# Altium PCB btn_single_v1.0.PcbDoc
Units mm, origin at the board's own origin, x right, y up, seen from the top; angles counter-clockwise.
Board outline 152.4 x 101.6 mm, 2 copper layers (Top Layer, Bottom Layer); 26 components, 21 nets, 86 pads, 0 vias.
Unrouted connection lines stored in the file: 6.
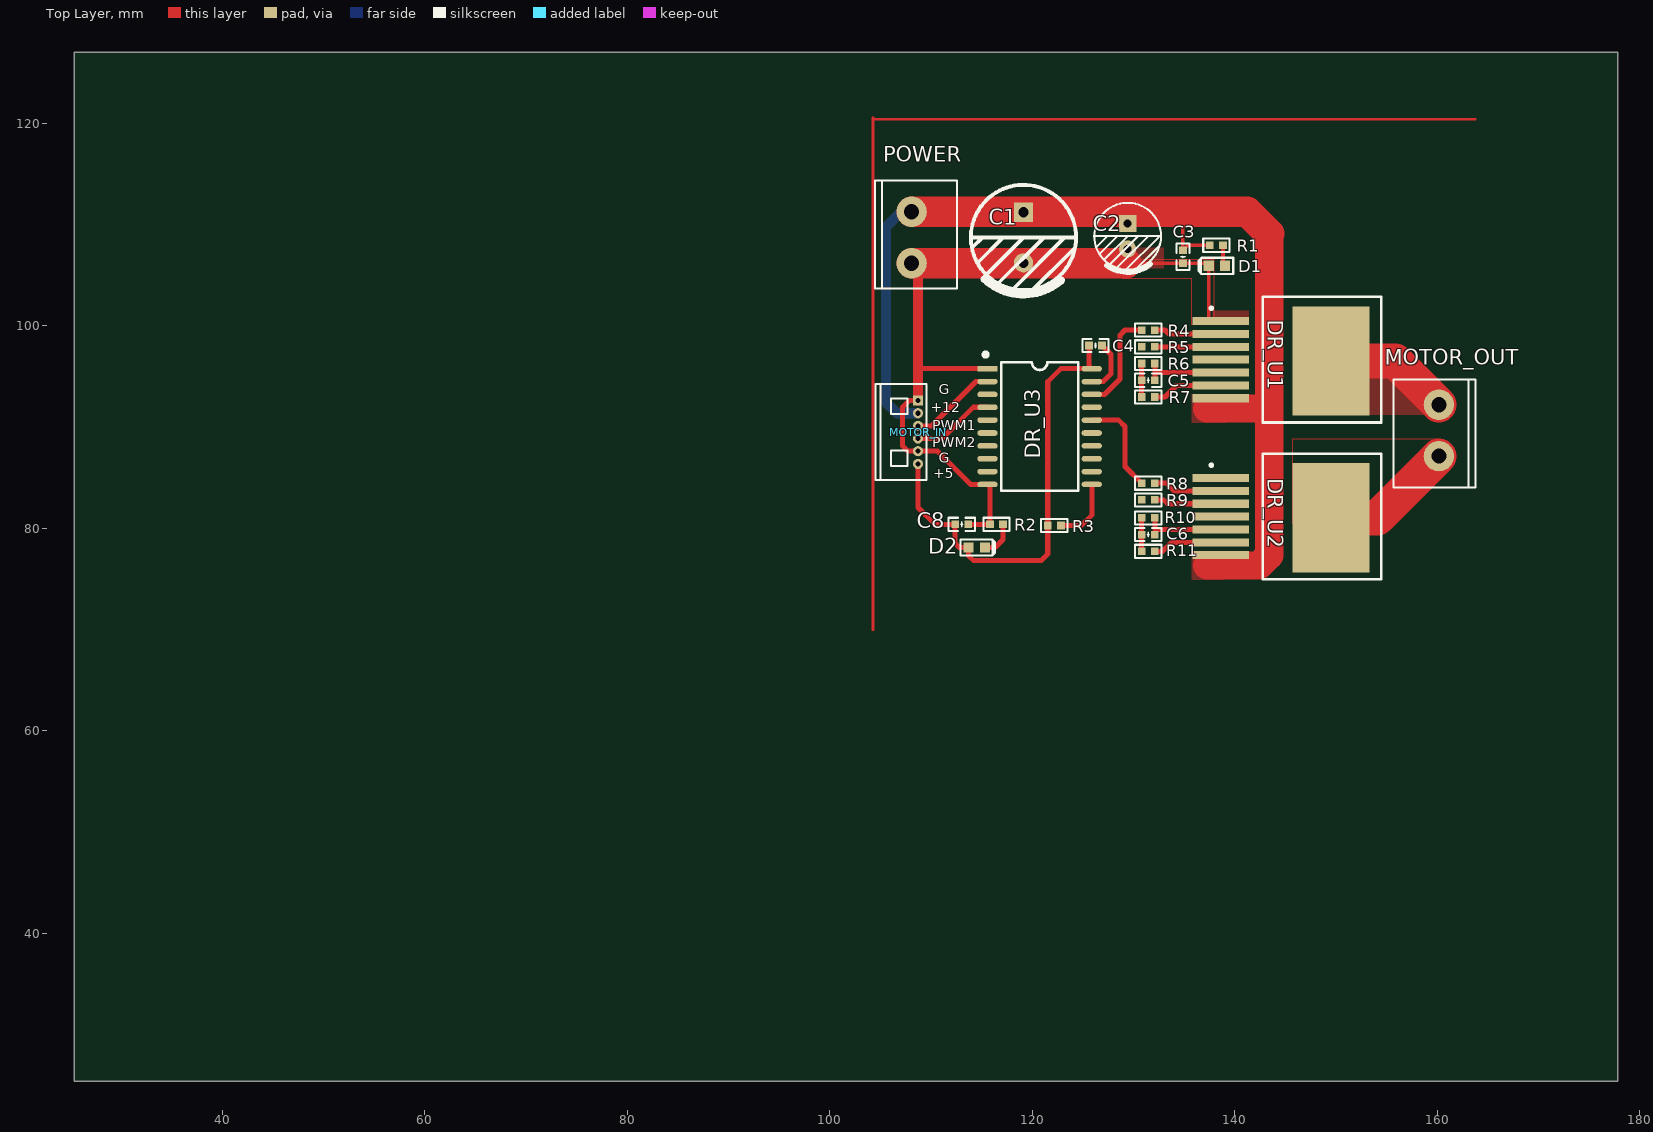
[diagram p0: Top Layer view]
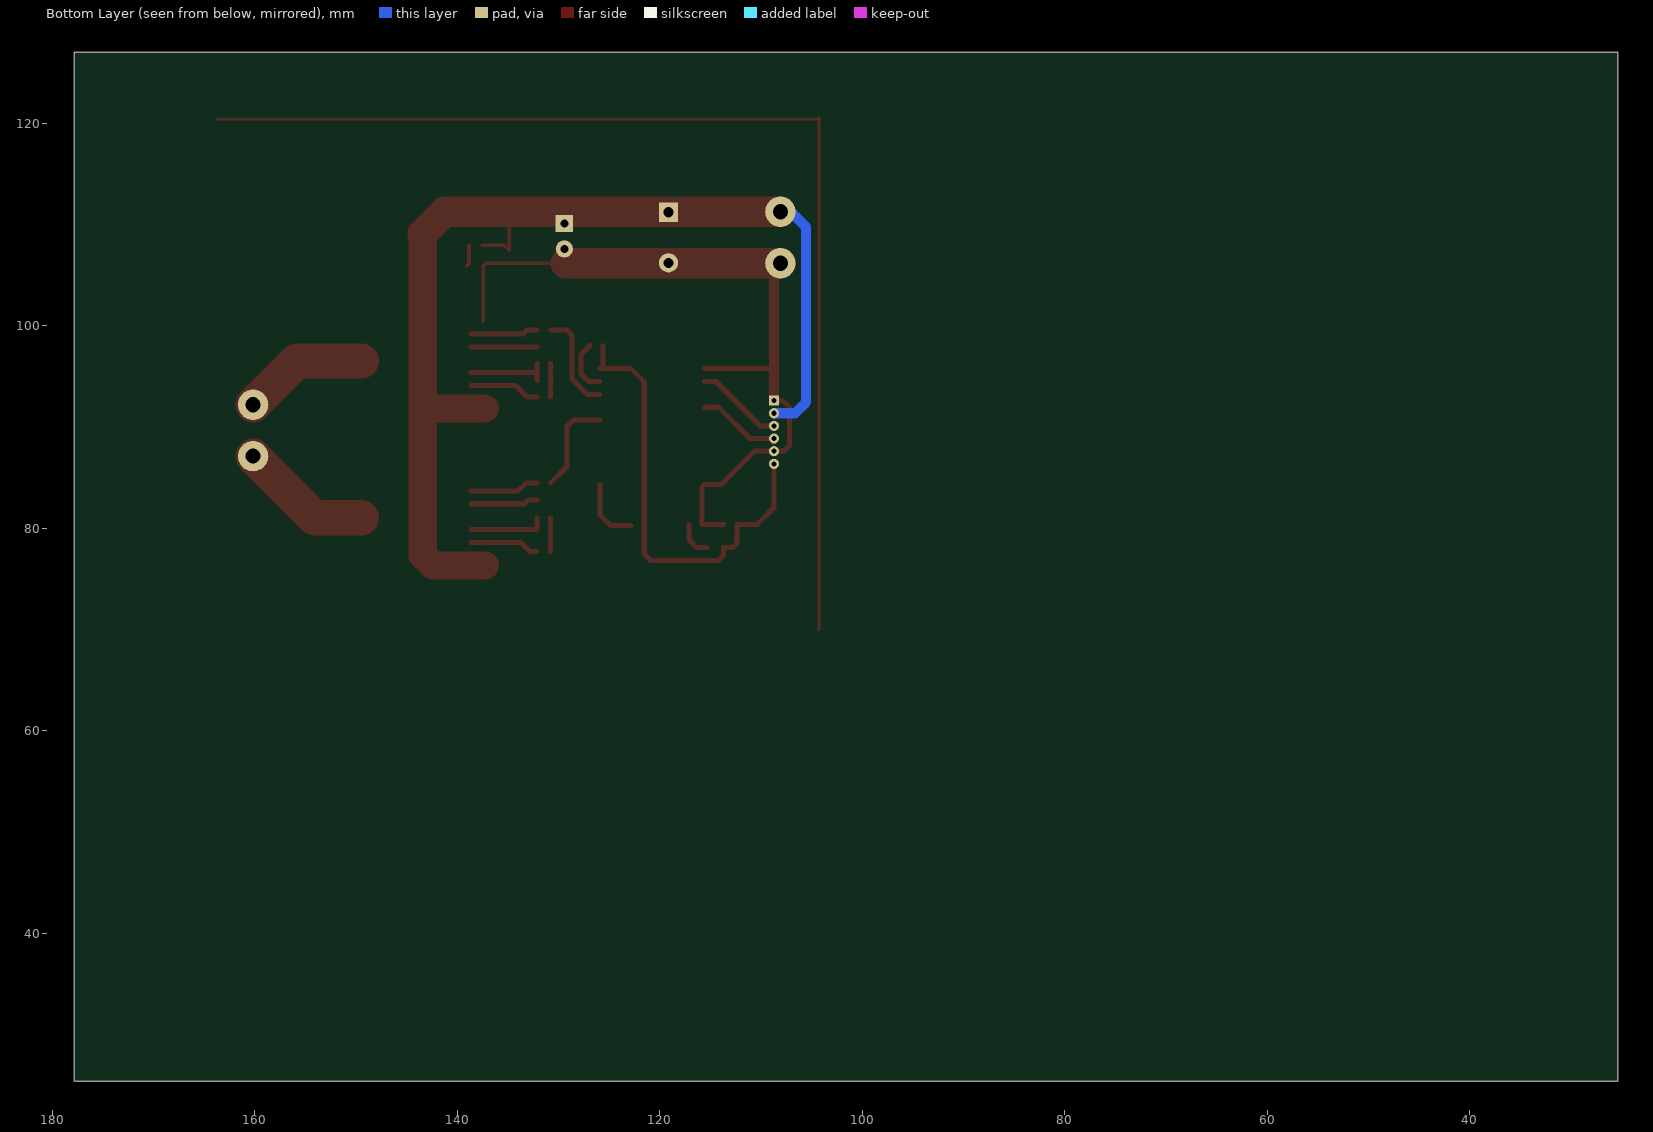
[diagram p1: Bottom Layer view, seen from below]
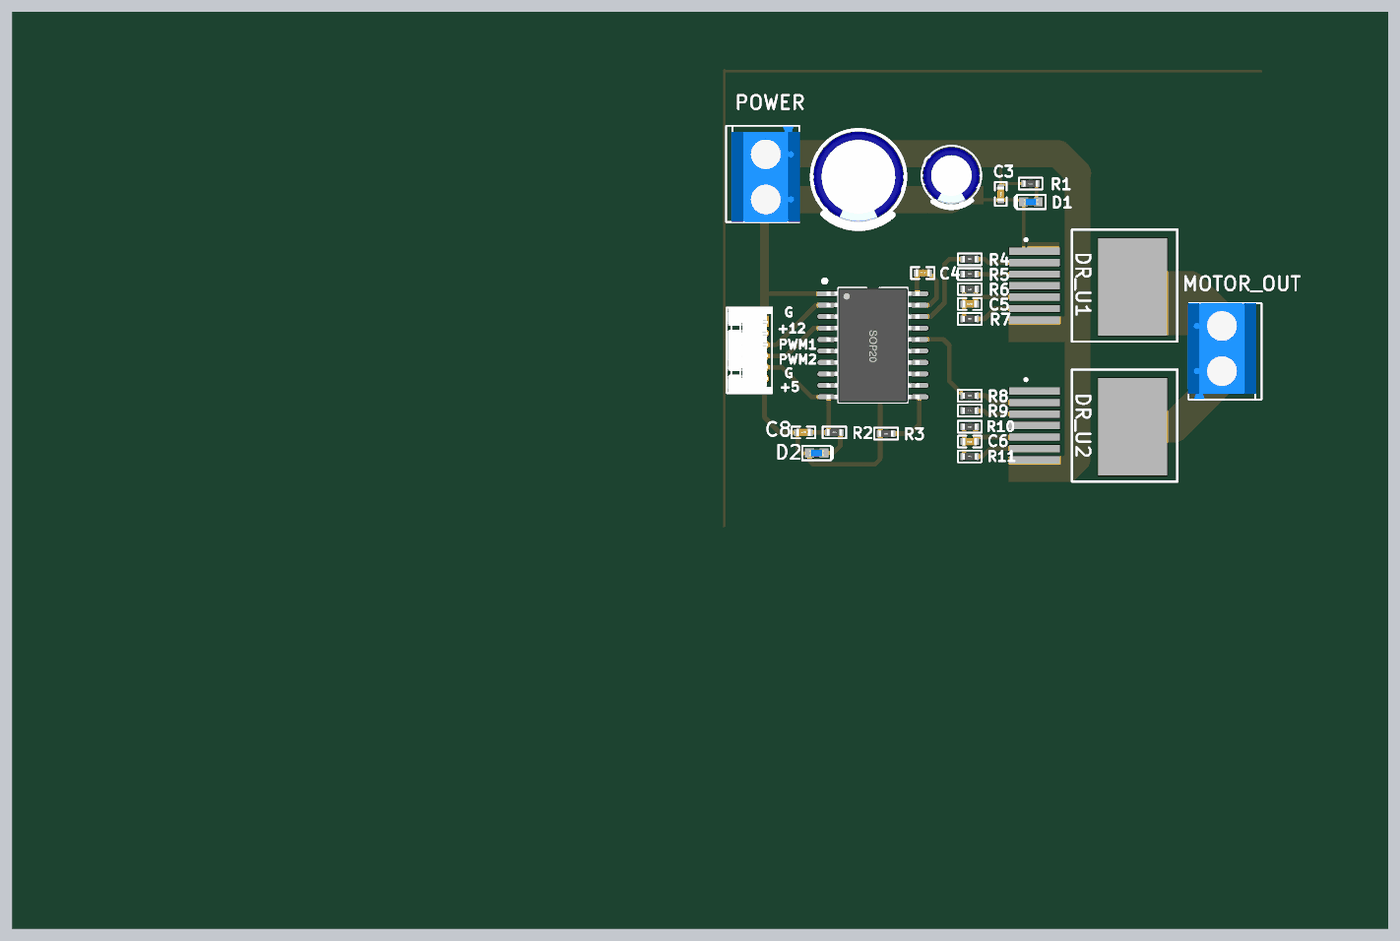
[diagram p2: 3D render of the assembled board from above, using the file's embedded part models]

## Layer stack, top to bottom
Top Solder: solder mask 0.0102, Solder Resist, Dk 3.5
Top Layer: signal copper 0.0356
Dielectric 1: dielectric 0.32, FR-4, Dk 4.8
Bottom Layer: signal copper 0.0356
Bottom Solder: solder mask 0.0102, Solder Resist, Dk 3.5

## Board outline
25.4,25.4 177.8,25.4 177.8,127 25.4,127

## Design rules (kind name [scope] priority, off if disabled: settings)
Clearance [All] p1: gap=0.25
PolygonConnect [All] p1: connectstyle=Direct reliefconductorwidth=0.254 reliefentries=4 polygonreliefangle="90 Angle" airgapwidth=0.254
RoutingVias [All] p1: holewidth=0.711 width=1.27 viastyle="Through Hole" minholewidth=0.711 minwidth=1.27 maxholewidth=0.711 maxwidth=1.27
SolderMaskExpansion [All] p1: expansion=0.102
Width [All] p1: maxlimit=10 minlimit=0.254 preferedwidth=0.254
30 further rules are at their usual default settings.

## Components (designator, comment, footprint, x,y, rotation, side; value= is the part's Value field where it differs from the comment)
C1 "Cap Pol1" "CAP 5.0*10*12.5" 119.126,108.712 r270 top
C2 "Cap Pol1" "CAP 2.5*6.3*7" 129.413,108.839 r270 top
C3 "Cap" "C 0603_L" 134.874,106.807 r270 top
C4 "Cap" "C 0603_L" 126.238,98.044 r0 top
C5 "Cap" "C 0603_L" 131.445,94.615 r180 top
C6 "Cap" "C 0603_L" 131.445,79.375 r180 top
C8 "Cap" "C 0603_L" 113.03,80.391 r0 top
D1 "LED2" "0603LED B" 138.938,105.918 r180 top
D2 "LED2" "0603LED B" 113.795,78.105 r0 top
DR_U1 "BTN7971B" BTN 145.923,107.696 r270 top
DR_U2 "BTN7971B" BTN 145.923,92.202 r270 top
DR_U3 "74HC244" SOP20_N 120.72,90.043 r0 top
MOTOR_IN "Header 6" "MX 1.25-WI-6P" 108.712,89.485 r270 top
MOTOR_OUT "Header 2" 2PIN-5.08B 160.147,92.202 r270 top
POWER "Header 2" 2PIN-5.08B 108.077,106.172 r90 top
R1 "Res2" "R 0603_L" 138.176,107.95 r180 top
R2 "Res2" "R 0603_L" 116.459,80.391 r0 top
R3 "Res2" "R 0603_L" 122.174,80.264 r180 top
R4 "Res2" "R 0603_L" 131.445,99.568 r0 top
R5 "Res2" "R 0603_L" 131.445,97.917 r0 top
R6 "Res2" "R 0603_L" 131.445,96.266 r180 top
R7 "Res2" "R 0603_L" 131.445,92.964 r0 top
R8 "Res2" "R 0603_L" 131.445,84.455 r0 top
R9 "Res2" "R 0603_L" 131.445,82.804 r0 top
R10 "Res2" "R 0603_L" 131.445,81.026 r180 top
R11 "Res2" "R 0603_L" 131.445,77.724 r0 top

## Footprints (in the part's own frame and the unit in brackets; to place one, negate y for a bottom-side part, rotate by r counter-clockwise, add the part's x,y. Pads: shape width x height; smd on the part's side, far side on the other; paste and mask are expansions set on the pad)
2PIN-5.08B [mm] "3A"
  round 3 hole 1.5: 1(0,0) 2(5.08,0)
  silkscreen extent -2.49,-4.47 8.18,3.61, body extent -2.48,-4.58 8.12,3.02, height 10
"0603LED B" [mm]
  rect 1x1 smd: 1(-0.099,0) 2(1.521,0)
  silkscreen extent -0.89,-0.8 2.51,0.8, body extent -0.1,-0.4 1.52,0.4, height 0.6
BTN [mm]
  rect 0.8x5.6 smd: 1(7.239,-7.31) 2(8.509,-7.31) 3(9.779,-7.31) 4(11.049,-7.31) 5(12.319,-7.31) 6(13.589,-7.31) 7(14.859,-7.31)
  rect 10.8x7.62 smd: 8(11.176,3.556)
  silkscreen extent 4.85,-8.38 17.25,8.51
"C 0603_L" [mil] "无极性贴片电容"
  rect 30x30 smd: 1(-25.59,0) 2(25.59,0)
  silkscreen extent -51,-26 51,26, body extent -31,-16 31,16, height 32
"CAP 2.5*6.3*7" [mm] "脚距2.5mm直径6.3mm高度7mm"
  rect 1.7x1.7 hole 0.8: 1(-1.25,0)
  round 1.7 hole 0.8: 2(1.25,0)
  silkscreen extent -3.3,-3.3 3.56,3.3, body extent -3.15,-3.15 3.16,3.15, height 7.03
"CAP 5.0*10*12.5" [mm] "脚距5mm直径10mm高度12.5mm"
  rect 1.9x1.9 hole 1: 1(-2.5,0)
  round 1.9 hole 1: 2(2.5,0)
  silkscreen extent -5.2,-5.21 5.64,5.2, body extent -5,-5.01 5.01,4.99, height 12.55
"MX 1.25-WI-6P" [mm] "长：9.25mm，宽：1.8mm，高：3.3mm"
  rect 1x1 hole 0.5: 1(-3.125,0)
  round 1 hole 0.5: 2(-1.875,0) 3(-0.625,0) 4(0.625,0) 5(1.875,0) 6(3.125,0)
  silkscreen extent -4.74,-4.19 4.74,0.85, body extent -4.62,-4.05 4.62,0.85, height 3.35
"R 0603_L" [mil] "1/10W贴片电阻"
  rect 30x30 smd: 1(-25.59,0) 2(25.59,0)
  silkscreen extent -51,-26 51,26, body extent -31,-16 32,16, height 16
SOP20_N [mm] "13*10.6*2.6（长宽高）"
  rect 2x0.55 smd: 1(-5.15,5.715)
  oval 2x0.55 smd: 2(-5.15,4.445) 3(-5.15,3.175) 4(-5.15,1.905) 5(-5.15,0.635) 6(-5.15,-0.635) 7(-5.15,-1.905) 8(-5.15,-3.175) 9(-5.15,-4.445) 10(-5.15,-5.715) 11(5.15,-5.715) 12(5.15,-4.445) 13(5.15,-3.175) 14(5.15,-1.905) 15(5.15,-0.635) 16(5.15,0.635) 17(5.15,1.905) 18(5.15,3.175) 19(5.15,4.445) 20(5.15,5.715)
  silkscreen extent -5.49,-6.35 3.81,7.27, body extent -5.15,-6.35 5.15,6.35, height 2.7

## Part data
C1 C2: "Polarized Capacitor (Radial)"
C3 C4 C5 C6 C8: "Capacitor"
D1 D2: "Typical RED, GREEN, YELLOW, AMBER GaAs LED"
MOTOR_IN: "Header, 6-Pin"
MOTOR_OUT POWER: "Header, 2-Pin"
R1 R2 R3 R4 R5 R6 R7 R8 R9 R10 R11: "Resistor"

## Nets (pads, with @x,y where several pads share a name; then routed paths per layer and width w, separated by ;. In a path a pad name is that pad's centre, name@x,y a point inside that pad or via, vN(x,y) a via of type N, cw(c..) or ccw(c..) an arc to the next point about the centre after c; other vN are vias at no path point)
5V: C4.1 C8.1 D2.1 DR_U3.20 MOTOR_IN.6 R3.2 | length 45.4
  Top Layer w0.5: MOTOR_IN.6 108.712,82.042 110.363,80.391 C8.1 112.38,78.501 112.776,78.105 D2.1 113.696,77.312 114.173,76.835 120.904,76.835 121.524,77.455 R3.2 121.524,94.473 122.809,95.758 DR_U3.20 125.588,96.04 C4.1
+12V: C1.1 C2.1 C3.1 DR_U1.7 DR_U2.7 MOTOR_IN.2 POWER.2 R1.2 | length 111.5
  Top Layer w0.35: 134.747,111.252 134.874,111.125 C3.1 135.367,107.95 R1.2
  Top Layer w2.8: 137.287,76.327 142.367,76.327 143.383,77.343 143.383,92.329 ; 137.287,91.821 142.875,91.821 143.383,92.329 ; 143.383,109.093 143.383,92.329
  Top Layer w3: POWER.2 134.747,111.252 141.224,111.252 143.383,109.093
  Bottom Layer w1: POWER.2 107.061,111.252 105.537,109.728 105.537,92.456 106.633,91.36 MOTOR_IN.2
EN: DR_U3.9 R5.1 R9.1
GND: C1.2 C2.2 C3.2 C4.2 C5.2 C6.2 C8.2 D1.2 DR_U1.1 DR_U2.1 DR_U3.1 DR_U3.10 DR_U3.19 MOTOR_IN.1 MOTOR_IN.5 POWER.1 R2.1 R6.2 R7.1 R10.2 R11.1 | length 89.2
  Top Layer w0.35: 129.286,106.172 129.301,106.157 C3.2 137.178,106.157 D1.2 DR_U1.1@137.417,100.457
  Top Layer w0.5: MOTOR_IN.1 107.85,92.61 107.188,91.948 107.188,88.138 107.716,87.61 MOTOR_IN.5 110.637,87.61 113.919,84.328 DR_U3.10 115.809,84.089 R2.1 C8.2 ; 108.966,95.758 DR_U3.1 ; DR_U3.19 127,94.488 127.762,95.25 127.762,97.17 C4.2 ; C5.2@130.668,94.488 C5.2 ; R11.1 C6.2 R10.2 ; R7.1 C5.2 ; R6.2 C5.2
  Top Layer w1: POWER.1 108.712,105.537 MOTOR_IN.1
  Top Layer w3: POWER.1 129.286,106.172
INL_1: DR_U3.18 R4.1 | length 10.1
  Top Layer w0.5: DR_U3.18 127.127,93.218 128.651,94.742 128.651,99.06 129.159,99.568 R4.1
INL_2: DR_U3.16 R8.1 | length 9.8
  Top Layer w0.5: DR_U3.16 128.524,90.678 129.159,90.043 129.159,86.091 R8.1
NetC5_1: C5.1 DR_U1.5 R6.1 | length 8.2
  Top Layer w0.5: C5.1 132.095,95.25 ; R6.1 132.095,95.25 ; DR_U1.5 132.222,95.377 132.095,95.25
NetC6_1: C6.1 DR_U2.5 R10.1 | length 7.7
  Top Layer w0.5: R10.1 132.095,79.883 DR_U2.5
NetD1_1: D1.1 R1.1 | length 2.1
  Top Layer w0.35: R1.1 138.826,106.129 D1.1
NetD2_2: D2.2 R2.2 | length 3.6
  Top Layer w0.5: D2.2 116.332,78.105 117.109,78.882 R2.2
NetDR_U1_2: DR_U1.2 R4.2 | length 6.7
  Top Layer w0.5: R4.2 133.096,99.568 133.477,99.187 DR_U1.2
NetDR_U1_3: DR_U1.3 R5.2 | length 6.5
  Top Layer w0.5: R5.2 DR_U1.3
NetDR_U1_6: DR_U1.6 R7.2 | length 7
  Top Layer w0.5: R7.2 133.096,92.964 134.239,94.107 DR_U1.6
NetDR_U2_2: DR_U2.2 R8.2 | length 6.8
  Top Layer w0.5: R8.2 133.223,84.455 133.985,83.693 DR_U2.2
NetDR_U2_3: DR_U2.3 R9.2 | length 6.7
  Top Layer w0.5: R9.2 132.969,82.804 133.35,82.423 DR_U2.3
NetDR_U2_6: DR_U2.6 R11.2 | length 6.9
  Top Layer w0.5: R11.2 132.842,77.724 133.731,78.613 DR_U2.6
NetDR_U3_11: DR_U3.11 R3.1 | length 6.5
  Top Layer w0.5: R3.1 124.841,80.264 125.87,81.293 DR_U3.11
OUTL_1: DR_U1.8 MOTOR_OUT.1 | length 12.5
  Top Layer w3.5: DR_U1.8 155.829,96.52 MOTOR_OUT.1
OUTL_2: DR_U2.8 MOTOR_OUT.2 | length 13.2
  Top Layer w3.5: DR_U2.8 154.051,81.026 MOTOR_OUT.2
PWML_1: DR_U3.2 MOTOR_IN.3 | length 8.7
  Top Layer w0.5: MOTOR_IN.3 110.049,90.11 114.427,94.488 DR_U3.2
PWML_2: DR_U3.4 MOTOR_IN.4 | length 8.1
  Top Layer w0.5: MOTOR_IN.4 111.085,88.86 114.173,91.948 DR_U3.4
pads on no net: DR_U1.4 DR_U2.4 DR_U3.3 DR_U3.5 DR_U3.6 DR_U3.7 DR_U3.8 DR_U3.12 DR_U3.13 DR_U3.14 DR_U3.15 DR_U3.17
copper on no net: | length 110
  Top Layer w0.254: 104.267,70 104.267,120.523 ; 104.267,120.396 163.715,120.396

## Polygon pours and split planes (outlines as drawn)
OUTL_1 on Top Layer "OUTL_1_L01_P004" (solid, remove dead copper, pour order 4): 145.669,91.059 161.069,91.059 154.465,97.663 153.449,97.663 145.669,97.663
OUTL_2 on Top Layer "OUTL_2_L01_P006" (solid, remove dead copper, pour order 6): 160.147,88.773 145.669,88.773 145.669,80.518 145.796,80.645 152.273,80.645
+12V on Top Layer "+12V_L01_P010" (solid, remove dead copper, pour order 10): 135.763,93.218 135.763,90.424 139.192,90.424 139.192,93.218
+12V on Top Layer "+12V_L01_P012" (solid, remove dead copper, pour order 12): 135.763,77.724 135.763,74.93 138.938,74.93 138.938,77.724
GND on Top Layer "GND_L01_P014" (solid, remove dead copper, pour order 14): 137.922,106.553 137.922,103.124 137.922,101.6 137.922,100.076 135.763,100.076 135.763,104.648 128.905,104.648 128.905,106.553
GND on Top Layer "GND_L01_P016" (solid, remove dead copper, pour order 16): 137.795,101.473 141.351,101.473 141.351,100.457 137.795,100.457
GND on Top Layer "GND_L01_P018" (solid, remove dead copper, pour order 18): 128.397,107.696 132.969,107.696 132.969,105.664 128.397,105.664

## Silkscreen, mask and mechanical layers (free items; w line width, h text height)
Top Overlay:
  text "G" at 110.744,93.218 h1
  text "+12" at 109.982,91.44 h1
  text "PWM1" at 110.109,89.662 h1
  text "PWM2" at 110.109,88.011 h1
  text "G" at 110.744,86.487 h1
  text "+5" at 110.236,84.963 h1